# EAGLE board esquema (EAGLE 5.11)
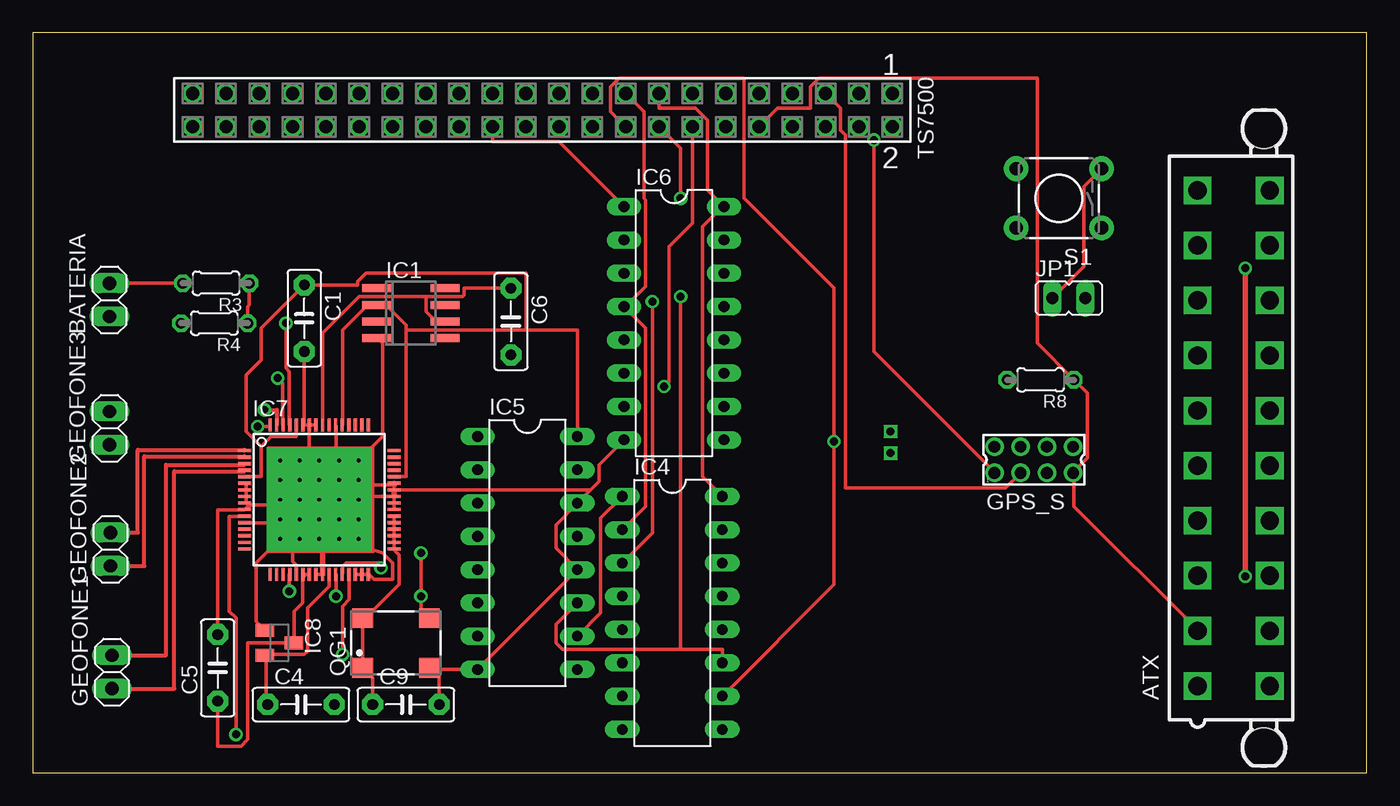
[diagram p0: board, top side]
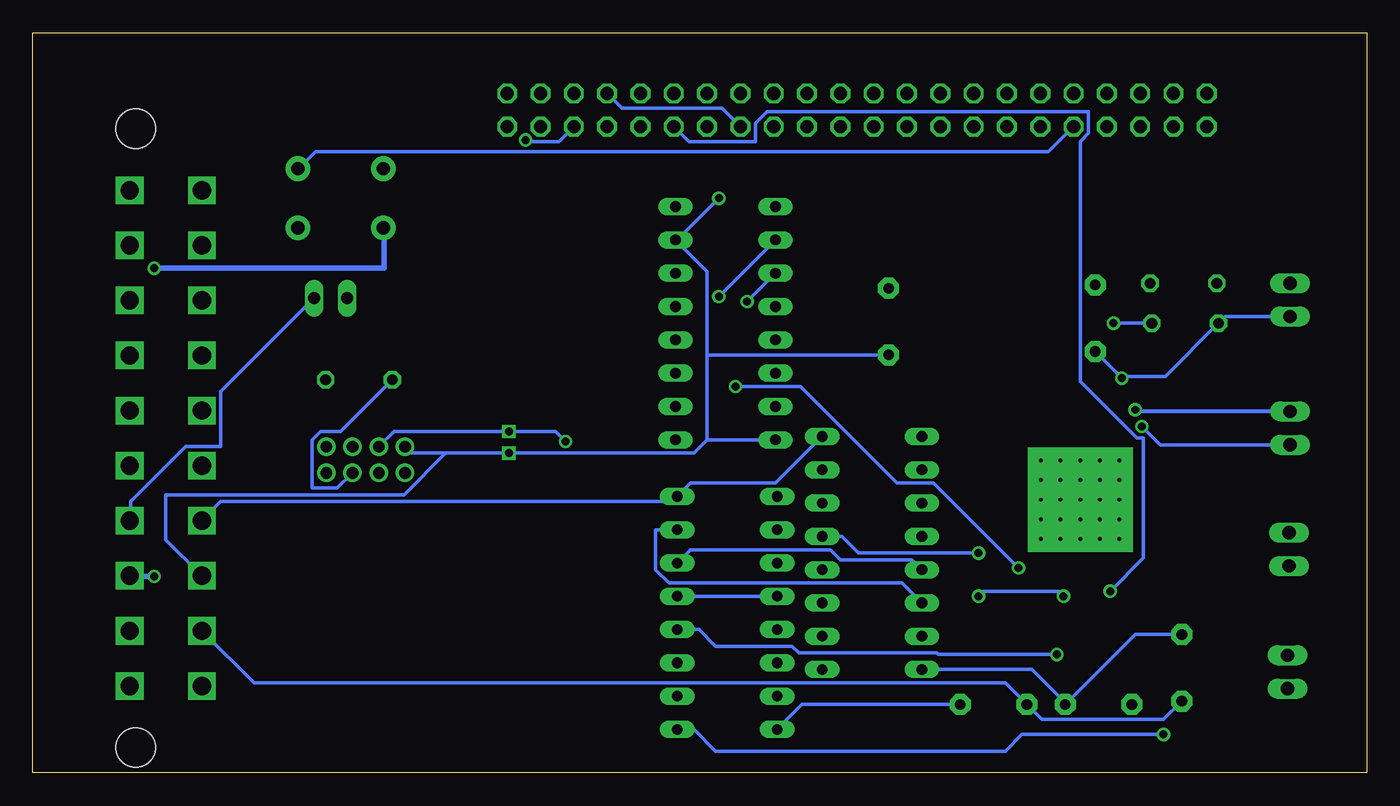
[diagram p1: board, bottom side, seen from below]

Size 101.71 x 56.44 mm. Coordinates in mm from the lower left corner, seen from the top.
Outline: 0,0 101.71,0 101.71,56.44 0,56.44 0,0
Copper layers (1*16): Top 0.035mm / dielectric 1.5mm / Bottom 0.035mm
Design rules "default": minimum track width 10mil, minimum drill 24mil, track to track 8mil, track to pad 8mil, pad to pad 8mil, via to via 8mil, smd to smd 8mil, copper to edge 40mil, drill to drill 8mil, minimum pad ring 10mil, minimum via ring 8mil, stop-mask expansion 4mil, vias tented up to drill 0mil, thermal gap 10mil

## Footprints (pad centres in the part's own frame; a part is rotated, then mirrored left to right if it is on the bottom)
5566-20 = drill 1.4 square: 1 18.9,-2.75; 2 14.7,-2.75; 3 10.5,-2.75; 4 6.3,-2.75; 5 2.1,-2.75; 6 -2.1,-2.75; 7 -6.3,-2.75; 8 -10.5,-2.75; 9 -14.7,-2.75; 10 -18.9,-2.75; 11 18.9,2.75; 12 14.7,2.75; 13 10.5,2.75; 14 6.3,2.75; 15 2.1,2.75; 16 -2.1,2.75; 17 -6.3,2.75; 18 -10.5,2.75; 19 -14.7,2.75; 20 -18.9,2.75 | hole 3: 23.6,2.29; -23.6,2.29
1X02 = drill 1.016 long: 1 -1.27,0; 2 1.27,0
C5B2.5 = drill 0.813 pad 1.6 octagon: 1 -2.54,0; 2 2.54,0
87758-0816 = drill 0.9 pad 1.27 round: 1 -3,-1; 2 -3,1; 3 -1,-1; 4 -1,1; 5 1,-1; 6 1,1; 7 3,-1; 8 3,1
SO08 = smd 0.6 x 2.2: 1 -1.905,-2.6; 2 -0.635,-2.6; 3 0.635,-2.6; 4 1.905,-2.6; 5 1.905,2.6; 6 0.635,2.6; 7 -0.635,2.6; 8 -1.905,2.6
DIL16 = drill 0.813 long: 1 -8.89,-3.81; 2 -6.35,-3.81; 3 -3.81,-3.81; 4 -1.27,-3.81; 5 1.27,-3.81; 6 3.81,-3.81; 7 6.35,-3.81; 8 8.89,-3.81; 9 8.89,3.81; 10 6.35,3.81; 11 3.81,3.81; 12 1.27,3.81; 13 -1.27,3.81; 14 -3.81,3.81; 15 -6.35,3.81; 16 -8.89,3.81
HTQFP-64-PAP = smd 1 x 0.25: 1 -5.7,3.75; 2 -5.7,3.25; 3 -5.7,2.75; 4 -5.7,2.25; 5 -5.7,1.75; 6 -5.7,1.25; 7 -5.7,0.75; 8 -5.7,0.25; 9 -5.7,-0.25; 10 -5.7,-0.75; 11 -5.7,-1.25; 12 -5.7,-1.75; 13 -5.7,-2.25; 14 -5.7,-2.75; 15 -5.7,-3.25; 16 -5.7,-3.75; 33 5.7,-3.75; 34 5.7,-3.25; 35 5.7,-2.75; 36 5.7,-2.25; 37 5.7,-1.75; 38 5.7,-1.25; 39 5.7,-0.75; 40 5.7,-0.25; 41 5.7,0.25; 42 5.7,0.75; 43 5.7,1.25; 44 5.7,1.75; 45 5.7,2.25; 46 5.7,2.75; 47 5.7,3.25; 48 5.7,3.75 | smd 0.25 x 1: 17 -3.75,-5.7; 18 -3.25,-5.7; 19 -2.75,-5.7; 20 -2.25,-5.7; 21 -1.75,-5.7; 22 -1.25,-5.7; 23 -0.75,-5.7; 24 -0.25,-5.7; 25 0.25,-5.7; 26 0.75,-5.7; 27 1.25,-5.7; 28 1.75,-5.7; 29 2.25,-5.7; 30 2.75,-5.7; 31 3.25,-5.7; 32 3.75,-5.7; 49 3.75,5.7; 50 3.25,5.7; 51 2.75,5.7; 52 2.25,5.7; 53 1.75,5.7; 54 1.25,5.7; 55 0.75,5.7; 56 0.25,5.7; 57 -0.25,5.7; 58 -0.75,5.7; 59 -1.25,5.7; 60 -1.75,5.7; 61 -2.25,5.7; 62 -2.75,5.7; 63 -3.25,5.7; 64 -3.75,5.7 | drill 0.3 pad 2 square: EXP1 -3,3; EXP2 -1.5,3; EXP3 0,3; EXP4 1.5,3; EXP5 3,3; EXP6 -3,1.5; EXP7 -1.5,1.5; EXP8 0,1.5; EXP9 1.5,1.5; EXP10 3,1.5; EXP11 -3,0; EXP12 -1.5,0; EXP13 0,0; EXP14 1.5,0; EXP15 3,0; EXP16 -3,-1.5; EXP17 -1.5,-1.5; EXP18 0,-1.5; EXP19 1.5,-1.5; EXP20 3,-1.5; EXP21 -3,-3; EXP22 -1.5,-3; EXP23 0,-3; EXP24 1.5,-3; EXP25 3,-3
SOT23 = smd 1 x 1.4: 1 -0.95,-1.1; 2 0.95,-1.1; 3 0,1.1
JP1 = drill 0.914 long: 1 0,-1.27; 2 0,1.27
SM77H = smd 1.6 x 1.5: 1 -2.55,-1.9; 2 2.55,-1.9; 3 2.55,1.9; 4 -2.55,1.9
0204/5 = drill 0.813 octagon: 1 -2.54,0; 2 2.54,0
TACTILE-PTH = drill 1.016 pad 1.88 round: 1 -3.251,2.261; 2 3.251,2.261; 3 -3.251,-2.261; 4 3.251,-2.261
SSW-122-02-S-D = drill 1 pad 1.5 octagon: 1 -26.67,-1.27; 2 -26.67,1.27; 3 -24.13,-1.27; 4 -24.13,1.27; 5 -21.59,-1.27; 6 -21.59,1.27; 7 -19.05,-1.27; 8 -19.05,1.27; 9 -16.51,-1.27; 10 -16.51,1.27; 11 -13.97,-1.27; 12 -13.97,1.27; 13 -11.43,-1.27; 14 -11.43,1.27; 15 -8.89,-1.27; 16 -8.89,1.27; 17 -6.35,-1.27; 18 -6.35,1.27; 19 -3.81,-1.27; 20 -3.81,1.27; 21 -1.27,-1.27; 22 -1.27,1.27; 23 1.27,-1.27; 24 1.27,1.27; 25 3.81,-1.27; 26 3.81,1.27; 27 6.35,-1.27; 28 6.35,1.27; 29 8.89,-1.27; 30 8.89,1.27; 31 11.43,-1.27; 32 11.43,1.27; 33 13.97,-1.27; 34 13.97,1.27; 35 16.51,-1.27; 36 16.51,1.27; 37 19.05,-1.27; 38 19.05,1.27; 39 21.59,-1.27; 40 21.59,1.27; 41 24.13,-1.27; 42 24.13,1.27; 43 26.67,-1.27; 44 26.67,1.27

## Placement (x,y rotation side)
ATX  5566-20  [5566-20]  91.57,25.53 270 top
BATERIA  [1X02]  5.84,36.07 90 top
C1  1uF  [C5B2.5]  20.7,34.67 270 top
C4  10uF  [C5B2.5]  20.45,5.21 0 top
C5  10uF  [C5B2.5]  14.1,8 90 top
C6  10uF  [C5B2.5]  36.45,34.42 270 top
C9  0.1uF  [C5B2.5]  28.45,5.21 0 top
GEOFONE1  [1X02]  6.04,7.69 90 top
GEOFONE2  [1X02]  5.93,17.05 90 top
GEOFONE3  [1X02]  5.84,26.29 90 top
GPS_S  87758-0816  [87758-0816]  76.33,23.88 0 top
IC1  REF02D  [SO08]  28.83,35.05 270 top
IC4  4572N  [DIL16]  48.77,12.19 270 top
IC5  74AC590N  [DIL16]  37.72,16.76 270 top
IC6  74LS157N  [DIL16]  48.9,34.29 270 top
IC7  ADS1278  [HTQFP-64-PAP]  21.84,20.83 0 top
IC8  [SOT23]  18.8,9.91 270 top
JP1  [JP1]  78.99,36.2 270 top
QG1  SM77H  [SM77H]  27.69,9.91 0 top
R3  5k  [0204/5]  13.97,37.34 180 top
R4  1k  [0204/5]  13.84,34.29 180 top
R8  100k  [0204/5]  76.83,29.97 180 top
S1  SWITCH-MOMENTARY-2PTH  [TACTILE-PTH]  78.23,43.81 180 top
TS7500  SSW-122-02-S-D  [SSW-122-02-S-D]  38.86,50.55 180 top

## Library data of the parts
ATX = con-molex; OC_FARNELL: unknown; OC_NEWARK: unknown
BATERIA GEOFONE1-GEOFONE3 = pinhead
C1 C4-C6 C9 = capacitor-wima
GPS_S = con-molex; MF: MOLEX; MPN: 87758-0816; OC_FARNELL: 7472331; OC_NEWARK: 59J1556
IC1 = linear
IC4 = 45xx
IC5 IC6 = 74xx-eu
IC7 = texas; MPN: ADS1278IPAPT; OC_FARNELL: 1603419; OC_NEWARK: 50M8811
IC8 = v-reg
JP1 = jumper
QG1 = crystal; OC_FARNELL: unknown; OC_NEWARK: unknown
R3 R4 = rcl
R8 = resistor
S1 = SparkFun
TS7500 = con-samtec; MPN: SSW-122-02-S-D; OC_FARNELL: unknown; OC_NEWARK: 11P9673

## Nets
2.5V: C6.1 IC1.6 IC7.56
+1V8: C4.1 IC7.26 IC8.2
+3V3: ATX.2 C5.1 C9.1 GPS_S.7 IC7.22 IC7.23 IC7.33 IC7.34 IC7.35 IC7.36 IC7.37 IC7.38 IC8.3 QG1.1 QG1.4 R8.1 TS7500.10
+5V: ATX.4 C1.1 IC1.2 IC4.16 IC5.16 IC6.16 IC7.5 IC7.44 IC7.53 IC7.60 TS7500.15
ADC_DATA: IC7.20 TS7500.12
CONT_144: IC4.3 IC6.3
CONT_RST: IC4.1 IC5.10
DR_INT: IC4.2 IC6.4 TS7500.17
FIRST_ADC_INT: IC4.11 IC5.11 IC6.2
GND: ATX.3 BATERIA.1 C1.2 C4.2 C5.2 C6.2 C9.2 GPS_S.2 IC1.4 IC4.8 IC5.8 IC5.12 IC5.14 IC6.8 IC6.15 IC7.6 IC7.7 IC7.8 IC7.9 IC7.10 IC7.12 IC7.21 IC7.24 IC7.25 IC7.30 IC7.31 IC7.32 IC7.39 IC7.40 IC7.41 IC7.42 IC7.43 IC7.54 IC7.57 IC7.58 IC7.59 IC7.62 IC8.1 QG1.2 R4.2 TS7500.7 TS7500.16
GPS_PPS: GPS_S.4 IC4.10 TS7500.18
N$1: IC6.1 TS7500.26
N$2: IC4.15 IC5.6
N$3: IC4.14 IC5.5
N$4: IC4.9 IC7.11
N$5: IC4.4 IC4.13
N$6: JP1.1 S1.3 TS7500.36
N$7: IC4.12 IC7.29
N$8: GEOFONE1.2 IC7.3
N$9: ATX.14 JP1.2
N$10: GEOFONE1.1 IC7.4
N$11: GEOFONE2.2 IC7.1
N$12: IC7.61 R3.1 R4.1
N$13: ATX.13
N$14: GEOFONE3.2 IC7.63
N$15: GEOFONE3.1 IC7.64
N$17: IC5.13 IC7.27 QG1.3
N$19: BATERIA.2 R3.2
N$42: GPS_S.1 TS7500.6
N$43: GPS_S.3 TS7500.5
N$44: GPS_S.5 R8.2
N$46: GEOFONE2.1 IC7.2
SPI_CLOCK: IC7.28 TS7500.14

## Tracks (layer width: path | path; a pad name or v marks a point on that pad's centre or on a via)
2.5V
  Top 0.254: 29.97,36.32 24.89,36.32 22.1,33.53 22.1,26.54 IC7.56 | 29.97,36.32 29.97,35.18 30.73,34.42 IC1.6 | C6.1 32.89,36.96 32.89,36.45 32.77,36.32 29.97,36.32
+1V8
  Top 0.254: IC7.26 22.61,15.11 22.61,14.22 20.95,12.57 20.95,9.27 20.7,9.02 17.78,9.02 IC8.2 17.78,8.89 17.78,5.33 C4.1
+3V3
  Top 0.254: IC7.23 21.08,15.11 20.7,15.11 IC7.22 20.7,14.99 20.57,14.86 20.57,12.95 19.94,12.32 19.94,9.91 IC8.3 16.38,9.91 16.38,2.54 15.88,2.03 14.1,2.03 C5.1 | IC7.38 27.56,19.56 27.56,19.18 IC7.37 27.56,19.05 27.56,18.67 IC7.36 27.56,18.54 27.56,18.16 IC7.35 27.56,18.03 27.56,17.65 IC7.34 27.56,17.53 27.56,17.14 IC7.33 27.56,17.02 27.94,16.64 27.94,14.35 25.27,11.68 QG1.4 25.15,11.68 25.15,8.13 QG1.1 25.91,7.24 C9.1 | TS7500.10 56.77,50.67 59.31,50.67 59.31,52.32 59.94,52.96 76.58,52.96 76.58,32.77 R8.1 80.39,28.96 80.39,24 79.38,22.99 GPS_S.7 79.38,22.86 79.38,20.32 88.77,10.92 ATX.2
  Bottom 0.254: C5.1 15.49,4.06 24.77,4.06 C9.1 27.56,6.86 84.84,6.86 88.77,10.79 ATX.2
+5V
  Top 0.254: 17.4,24.89 17.4,22.61 16.26,22.61 IC7.5 | 17.4,24.89 18.16,25.65 20.07,25.65 20.07,26.42 IC7.60 | 17.4,24.89 16.26,26.04 16.26,30.35 17.4,31.5 17.4,33.91 C1.1 24.77,37.21 24.77,37.47 25.4,38.1 37.59,38.1 37.59,33.78 | TS7500.15 47.75,50.67 50.55,50.67 51.44,49.78 51.44,44.45 IC6.16 52.58,43.18 51.05,41.66 51.05,22.61 IC4.16 | 28.45,33.78 28.45,34.16 26.92,35.69 IC1.2 25.53,35.69 23.62,33.78 23.62,26.54 IC7.53 | 28.45,33.78 28.45,22.61 27.56,22.61 IC7.44 | 37.59,33.78 41.53,33.78 IC5.16 | 37.59,33.78 28.45,33.78
  Bottom 0.254: IC5.16 45.09,22.1 51.56,22.1 IC4.16 52.96,20.7 87.38,20.7 88.77,19.3 ATX.4
ADC_DATA  (via drill 0.61)
  Top 0.254: v19.56,13.84 19.56,15.11 IC7.20
  Bottom 0.254: v19.56,13.84 17.02,16.38 17.02,25.53 17.53,25.53 21.84,29.84 21.84,48.13 21.21,48.77 21.21,50.42 45.72,50.42 46.61,49.53 46.61,48.13 51.69,48.13 TS7500.12
CONT_144  (via drill 0.61)
  Top 0.254: IC4.3 47.24,18.29 v47.24,35.94
  Bottom 0.254: v47.24,35.94 IC6.3
CONT_RST
  Top 0.254: IC5.10 43.31,12.19 43.31,19.43 IC4.1
DR_INT
  Top 0.254: IC4.2 46.74,20.32 46.74,33.91 IC6.4 45.21,35.56 46.74,37.08 46.74,43.69 46.61,43.81 46.61,50.42 TS7500.17
FIRST_ADC_INT  (via drill 0.61)
  Top 0.254: IC5.11 39.88,11.3 39.88,9.91 40.39,9.4 49.4,9.4 | 49.4,9.4 52.58,9.4 IC4.11 | 49.4,9.4 v49.4,36.32
  Bottom 0.254: v49.4,36.32 IC6.2
GND  (via drill 0.61)
  Top 0.254: 24.77,17.4 26.67,16.76 27.43,16 27.43,14.73 26.04,14.73 25.65,15.11 IC7.32 25.53,15.11 25.15,15.11 IC7.31 25.02,15.11 24.64,15.11 IC7.30 | IC7.39 27.56,20.19 27.56,20.57 IC7.40 27.56,20.7 27.56,20.95 IC7.41 27.56,21.08 | TS7500.16 49.4,47.62 v49.4,43.81 | IC1.4 26.29,33.15 26.67,32.77 26.67,25.65 25.15,24.13 | IC7.54 23.11,26.42 23.11,24.26 23.11,24.13 21.08,24.13 IC7.58 IC7.57 21.59,26.54 21.21,26.54 IC7.58 21.08,26.54 20.7,26.54 IC7.59 20.7,26.67 C1.2 | IC7.43 27.56,21.97 27.56,21.59 IC7.42 | IC7.25 21.97,15.11 21.72,15.11 IC7.24 21.59,15.24 | IC7.6 16.26,21.97 16.26,21.59 IC7.7 16.26,21.46 16.26,21.08 IC7.8 16.26,20.95 16.26,20.7 IC7.9 16.26,20.57 16.45,20.38 16.26,20.19 IC7.10 16.13,20.07 14.1,20.07 C5.2 | IC7.42 27.56,21.46 | IC6.8 43.18,23.5 43.18,22.23 42.48,21.53 | IC7.42 27.69,21.59 42.42,21.59 42.48,21.53 | IC7.21 20.07,15.24 20.07,15.75 20.13,15.81 19.81,16.13 19.81,17.27 18.29,17.27 17.02,16 17.02,11.53 IC8.1 17.65,10.92 17.02,11.56 | 42.48,21.53 IC5.14 39.88,18.92 39.88,17.14 IC5.12 41.4,15.49 41.4,15.37 IC5.8 30.61,7.87 QG1.2 30.35,8 30.99,7.37 C9.2 | IC7.12 16.26,19.05 18.67,19.05 | 16.45,20.45 18.67,20.45 | 27.54,21.97 25.02,21.97 25.02,21.72 25.27,21.46 | IC7.41 25.65,21.08 25.27,21.46 | 25.27,21.46 25.27,21.59 24.89,21.97 25.02,22.1 | IC7.62 19.05,26.54 19.05,29.72 v18.67,30.1
  Top 0.406: 27.56,21.08 IC7.41 IC7.42 | 23.11,24.26 25.02,24.26 25.15,24.13 25.02,24.13 25.02,22.1 25.02,21.97 | IC7.43 27.54,21.97 | 22.09,17.4 IC7.25 | 22.1,17.4 22.09,17.4 | 22.1,17.4 24.77,17.4 | 16.45,20.38 16.45,20.45 | 18.67,20.45 18.67,19.05 22.1,19.05 22.1,17.4 | 19.81,17.27 19.81,17.4 22.09,17.4
  Bottom 0.254: TS7500.7 56.77,50.67 49.15,50.67 TS7500.16 | ATX.3 88.9,15.11 91.57,17.78 91.57,21.21 73.41,21.21 70.23,24.38 | GPS_S.2 73.28,24.77 72.9,24.38 70.23,24.38 | v49.4,43.81 52.58,40.64 IC6.15 50.29,38.23 50.29,31.88 | 70.23,24.38 v65.41,24.38 51.31,24.38 50.29,25.4 | 50.29,31.88 C6.2 | 50.29,25.4 50.29,31.88 | IC6.8 50.29,25.4 | IC4.8 43.05,5.21 C9.2 | IC5.8 25.53,7.87 22.99,5.33 C4.2 17.65,10.54 C5.2 | C1.2 v18.67,30.1 18.67,30.23 15.37,30.23 R4.2 10.79,34.8 BATERIA.1
GPS_PPS  (via drill 0.61)
  Top 0.254: IC4.10 61.09,14.35 v61.09,25.27 61.09,36.96 54.23,43.81 54.23,52.96 44.7,52.96 44.07,52.32 44.07,50.42 TS7500.18
  Bottom 0.254: v61.09,25.27 61.85,26.04 v65.41,26.04 74.17,26.04 GPS_S.4
N$1
  Top 0.254: IC6.1 40.13,48.13 35.05,48.13 TS7500.26
N$2
  Bottom 0.254: IC5.6 35.43,14.48 53.21,14.48 54.23,15.49 54.23,18.54 IC4.15
N$3
  Bottom 0.254: IC5.5 34.67,16.26 40.13,16.26 40.89,17.02 51.56,17.02 IC4.14
N$4  (via drill 0.61)
  Top 0.254: v15.49,2.92 15.49,11.81 14.99,12.32 14.99,19.56 16.13,19.56 IC7.11
  Bottom 0.254: v15.49,2.92 26.29,2.92 27.56,1.65 49.66,1.65 51.31,3.3 IC4.9
N$5
  Bottom 0.254: IC4.4 IC4.13
N$6
  Top 0.254: JP1.1 80.14,38.61 80.14,44.7 81.41,45.97 S1.3
  Bottom 0.254: TS7500.36 24.26,47.37 80.14,47.37 81.41,46.1 S1.3
N$7  (via drill 0.61)
  Top 0.254: v23.62,9.02 23.62,12.7 24.13,13.21 24.13,15.11 IC7.29
  Bottom 0.254: v23.62,9.02 32.64,9.02 32.77,9.14 43.31,9.14 43.81,9.65 49.66,9.65 50.93,10.92 IC4.12
N$8
  Top 0.305: GEOFONE1.2 10.16,8.96 10.16,23.5 16.14,23.5 IC7.3
N$9
  Bottom 0.254: JP1.2 87.38,29.08 87.38,24.89 90.04,24.89 94.23,20.7 94.23,19.3 ATX.14
N$10
  Top 0.305: GEOFONE1.1 10.79,6.42 10.79,22.99 16.14,22.99 IC7.4
N$11
  Top 0.305: GEOFONE2.2 8,18.32 8,24.64 16.14,24.64 IC7.1
N$12  (via drill 0.61)
  Top 0.254: v19.3,34.29 19.3,30.86 19.56,30.61 19.56,26.54 IC7.61 | R3.1 16.51,35.69 16.38,35.56 R4.1
  Bottom 0.254: v19.3,34.29 R4.1
N$13  (via drill 0.6)
  Top 0.406: v92.46,14.99 v92.46,38.48
  Bottom 0.406: 74.93,41.4 74.93,38.48 v92.46,38.48 | ATX.13 94.23,14.99 v92.46,14.99
N$14  (via drill 0.6)
  Top 0.305: v17.65,27.69 18.59,27.69 IC7.63
  Bottom 0.305: v17.65,27.69 17.53,27.56 GEOFONE3.2
N$15  (via drill 0.61)
  Top 0.254: v17.14,26.42 18.03,26.42 IC7.64
  Bottom 0.254: v17.14,26.42 15.75,25.02 GEOFONE3.1
N$17  (via drill 0.61)
  Top 0.254: v29.59,16.76 v29.59,13.46 29.59,11.81 30.23,11.81 QG1.3 | v23.11,13.46 23.11,15.11 IC7.27
  Bottom 0.254: v29.59,16.76 38.73,16.76 40.01,18.03 IC5.13 | v23.11,13.46 23.5,13.84 29.21,13.84 v29.59,13.46
N$19
  Top 0.254: BATERIA.2 R3.2
N$42  (via drill 0.61)
  Top 0.254: v64.14,48.26 64.14,32.13 73.28,22.99 GPS_S.1
  Bottom 0.254: v64.14,48.26 64.01,48.13 61.59,48.13 TS7500.6
N$43
  Top 0.254: TS7500.5 61.59,50.67 61.59,49.02 61.98,48.64 61.98,21.72 74.17,21.72 GPS_S.3
N$44
  Bottom 0.254: R8.2 78.23,26.04 79.76,26.04 80.39,25.4 80.39,21.72 78.49,21.72 GPS_S.5
N$46
  Top 0.305: GEOFONE2.1 8.51,15.78 8.51,24.13 16.14,24.13 IC7.2
SPI_CLOCK  (via drill 0.61)
  Top 0.254: v26.54,15.62 26.54,16 23.88,16 23.62,15.75 23.62,15.24 IC7.28 | v48.13,29.46 48.51,29.84 48.51,40.13 50.29,41.91 TS7500.14
  Bottom 0.254: v26.54,15.62 33.02,22.1 35.81,22.1 43.18,29.46 v48.13,29.46
(copper drawn outside any net)
  shapes: Top area x1